# EAGLE board PCB-RPIBO1_SDEXT (EAGLE 6.5.0)
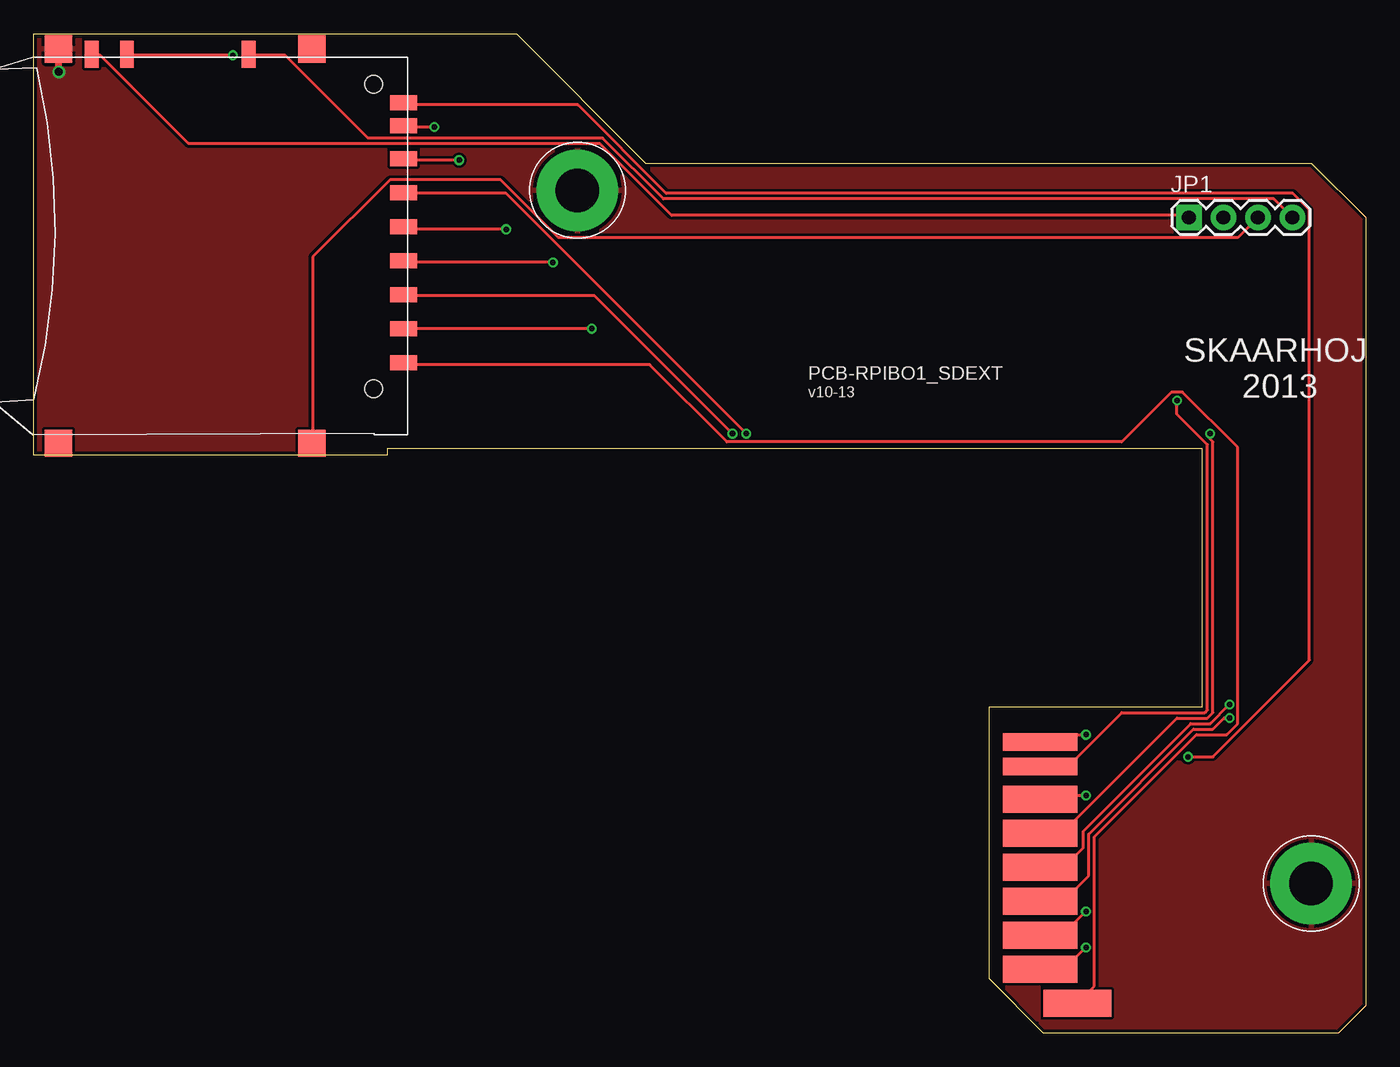
[diagram p0: board, top side]
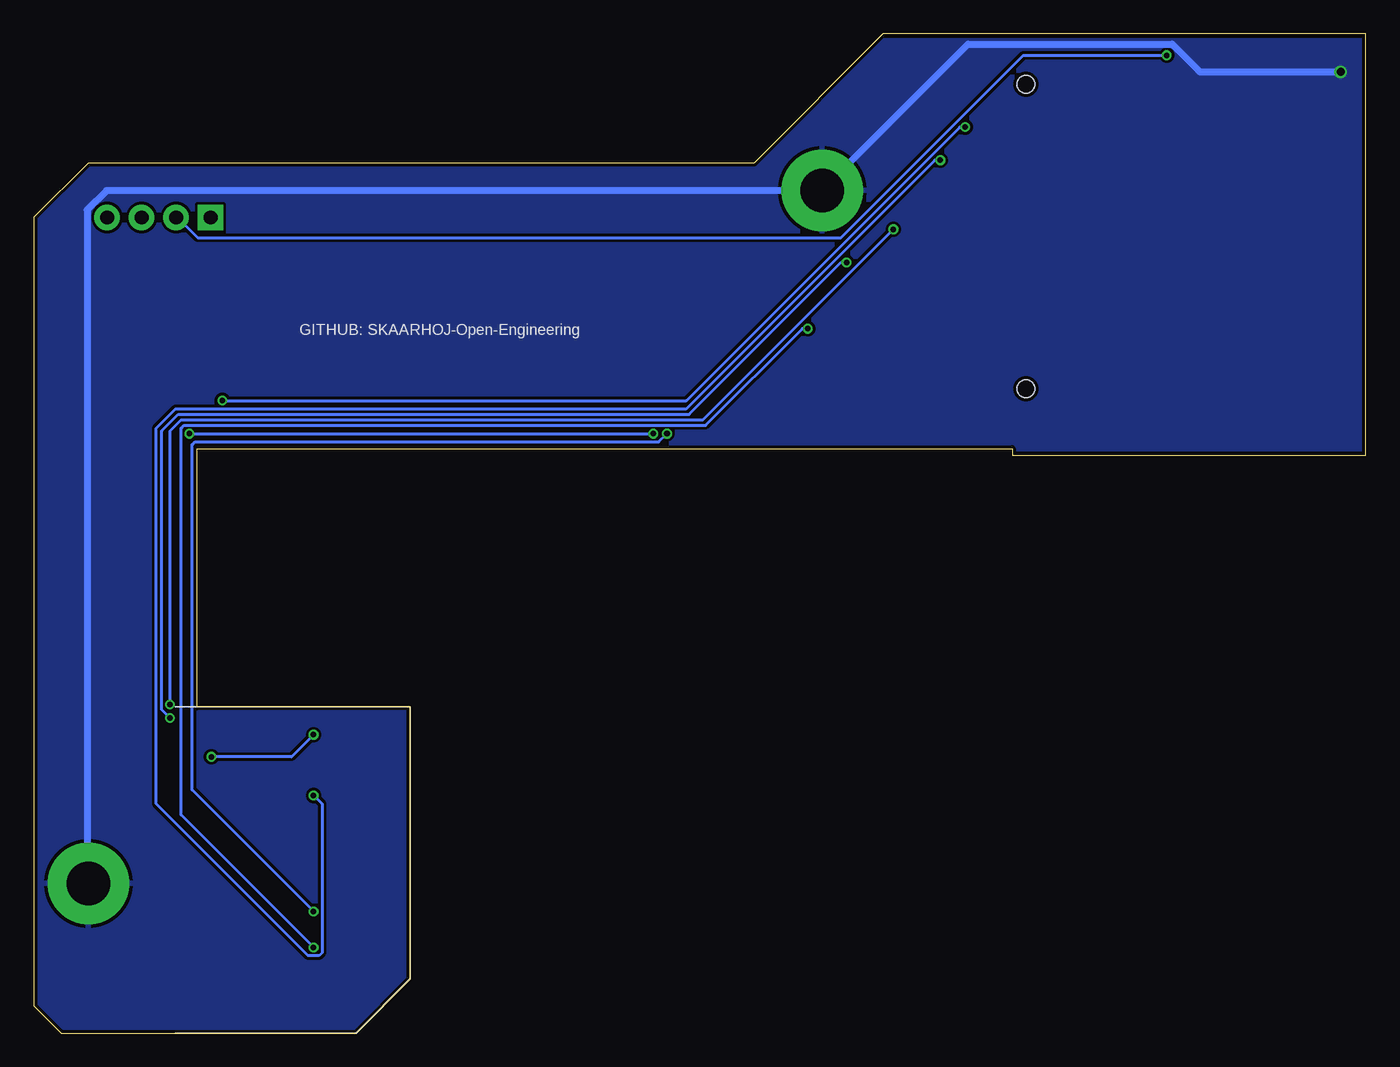
[diagram p1: board, bottom side, seen from below]

Size 98 x 73.5 mm. Coordinates in mm from the lower left corner, seen from the top.
Outline: 74.3,0 70.3,4 70.3,24 86,24 86,43 26,43 26,42.5 0,42.5 0,73.5 35.5,73.5 45,64 94,64 98,60 98,2 96,0 74.3,0
Copper layers (1*16): Top 0.035mm / dielectric 1.5mm / Bottom 0.035mm
Design rules "Fusion_eagle_rule_v1.1": minimum track width 6mil, minimum drill 12mil, track to track 6mil, track to pad 6mil, pad to pad 6mil, via to via 6mil, smd to smd 0mil, copper to edge 10mil, drill to drill 10mil, minimum pad ring 10mil, minimum via ring 6mil, stop-mask expansion 2mil, vias tented up to drill 100mil, thermal gap 10mil
Net classes: 0 default: width 0.203 mm, drill 0.406 mm, clearance 0.152 mm; 1 Power: width 0.508 mm, drill 0.61 mm, clearance 0.203 mm; 3 INput lines: clearance 0.203 mm

## Footprints (pad centres in the part's own frame; a part is rotated, then mirrored left to right if it is on the bottom)
1X04 = drill 1.016 pad 1.88 square: 1 0,0 | drill 1.016 pad 1.88: 2 2.54,0; 3 5.08,0; 4 7.62,0
SD_LARGE = smd 1.1 x 2: 1 6.775,2.2; 2 4.275,2.2; 3 1.775,2.2; 4 -0.725,2.2; 5 -3.225,2.2; 6 -5.725,2.2; 7 -8.15,2.2; 8 -9.85,2.2; 9 9.275,2.2 | smd 2 x 1: CD -13.4,-9.2; WP -13.4,-18.15; WP1 -13.4,-20.75 | smd 2 x 2: GP -13.8,-23.2; GP2 15.2,-23.2; GP3 15.2,-4.55; GP4 -13.8,-4.55 | hole 1.3: -11.2,0; 11.2,0
SD_MALEPCB = smd 2 x 5.5 bottom: 1 7.3,-3.75; 2 4.8,-3.75; 3 2.3,-3.75; 4 -0.2,-3.75; 5 -2.7,-3.75; 6 -5.2,-3.75 | smd 1.3 x 5.5 bottom: 7 -7.6,-3.75; 8 -9.4,-3.75 | smd 2 x 5 bottom: 9 9.8,-6.5
3.2MMPAD6MM = drill 3.2 pad 6: P$1 0,0

## Placement (x,y rotation side)
JP1  [1X04]  85,60 0 top
U$2  SD06132  [SD_LARGE]  25,58.6 270 top
U$4  SDMALEPCB  [SD_MALEPCB]  70.3,12 270 bottom
U$5  GNDPAD6MM  [3.2MMPAD6MM]  40,62 0 top
U$7  GNDPAD6MM  [3.2MMPAD6MM]  94,11 0 top

## Library data of the parts
JP1 = SparkFun
U$2 U$4 U$5 U$7 = SKAARHOJ

## Nets
GND [Power]: U$2.GP U$5.P$1 U$7.P$1
N$1: U$2.7 U$4.7
N$2: U$2.2 U$4.2
N$3: U$2.5 U$4.5
N$4: U$2.1 U$4.1
N$5: U$2.8 U$4.8
N$6: U$2.9 U$4.9
N$7: JP1.4 U$2.CD
N$8: JP1.3 U$2.GP3
N$9: JP1.2 U$2.WP
N$10: JP1.1 U$2.WP1
VDD: U$2.4 U$4.4
VSS1: U$2.3 U$4.3
VSS2: U$2.6 U$4.6

## Tracks (layer width: path | path; a pad name or v marks a point on that pad's centre or on a via)
GND  (via drill 0.61)
  Top 0.508: v1.83,70.71 1.83,72.34 U$2.GP
  Bottom 0.508: v1.83,70.71 12.19,70.71 14.22,72.75 29.26,72.75 39.83,62.18 U$5.P$1 40.23,61.98 92.66,61.98 94.08,60.55 94.08,11.18 U$7.P$1
  pour Top: 0,73 98,73 98,0 70,0 70,24 86,24 86,43 0,43
  pour Bottom: 0,73 98,73 98,0 70,0 70,24 86,24 86,25 86,43 0,43
N$1  (via drill 0.41)
  Top 0.203: v29.46,66.65 27.23,66.65 U$2.7 | v84.12,46.53 84.12,45.52 86.36,43.28 86.36,23.77 86.16,23.57 80.06,23.57 76.2,19.71 74.17,19.71 U$4.7
  Bottom 0.203: v29.46,66.65 29.87,66.65 49.99,46.53 v84.12,46.53
N$2  (via drill 0.41)
  Top 0.203: v51.41,44.09 41.25,54.25 27.23,54.25 U$2.2 | v77.42,8.94 75.79,7.32 74.17,7.32 U$4.2
  Bottom 0.203: v51.41,44.09 52.02,43.48 86.16,43.48 86.36,43.28 86.36,17.88 v77.42,8.94
N$3  (via drill 0.41)
  Top 0.203: v52.43,44.09 34.75,61.77 27.23,61.77 U$2.5 | v86.56,44.09 86.56,43.69 86.77,43.48 86.77,23.57 86.36,23.16 84.12,23.16 75.79,14.83 74.17,14.83 U$4.5
  Bottom 0.203: v86.56,44.09 v52.43,44.09
N$4  (via drill 0.41)
  Top 0.203: v41.05,51.82 27.23,51.82 U$2.1 | v77.42,6.3 76,4.88 74.17,4.88 U$4.1
  Bottom 0.203: v41.05,51.82 41.45,51.82 48.56,44.7 86.97,44.7 87.17,44.5 87.17,16.05 v77.42,6.3
N$5  (via drill 0.41)
  Top 0.203: v84.94,20.32 86.77,20.32 93.88,27.43 93.88,60.55 92.66,61.77 46.53,61.77 40.03,68.28 27.23,68.28 U$2.8 | v77.42,21.95 74.57,21.95 74.17,21.54 U$4.8
  Bottom 0.203: v84.94,20.32 79.05,20.32 v77.42,21.95
N$6
  Top 0.203: U$2.9 27.23,49.17 45.31,49.17 51,43.48 80.06,43.48 83.72,47.14 84.53,47.14 88.59,43.08 88.59,22.76 87.78,21.95 85.55,21.95 78.03,14.43 78.03,3.45 76.81,2.23 U$4.9
N$7
  Top 0.203: U$2.CD 15.85,71.93 18.49,71.93 24.59,65.84 41.86,65.84 46.33,61.37 91.24,61.37 92.46,60.15 JP1.4
N$8
  Top 0.203: U$2.GP3 20.52,43.48 20.52,57.1 26.21,62.79 34.34,62.79 38.61,58.52 88.59,58.52 90.02,59.94 JP1.3
N$9  (via drill 0.41)
  Top 0.203: v14.63,71.93 6.91,71.93 U$2.WP
  Bottom 0.203: v14.63,71.93 25.2,71.93 38.61,58.52 85.95,58.52 87.38,59.94 JP1.2
N$10
  Top 0.203: U$2.WP1 4.27,71.93 4.88,71.93 11.38,65.43 41.66,65.43 46.94,60.15 84.94,60.15 JP1.1
VDD  (via drill 0.41)
  Top 0.203: v34.75,59.13 27.23,59.13 U$2.4 | v87.99,24.18 86.56,22.76 85.14,22.76 77.22,14.83 77.22,13.61 76,12.39 74.17,12.39 U$4.4
  Bottom 0.203: v34.75,59.13 48.77,45.11 87.17,45.11 87.99,44.3 v87.99,24.18
VSS1  (via drill 0.41)
  Top 0.203: v38.2,56.69 27.23,56.69 U$2.3 | v87.99,23.16 87.58,23.16 86.77,22.35 85.34,22.35 77.62,14.63 77.62,11.58 75.79,9.75 74.17,9.75 U$4.3
  Bottom 0.203: v38.2,56.69 38.61,56.69 49.78,45.52 87.38,45.52 88.59,44.3 88.59,23.77 v87.99,23.16
VSS2  (via drill 0.41)
  Top 0.203: v31.29,64.21 27.23,64.21 U$2.6 | v77.42,17.48 74.37,17.48 74.17,17.27 U$4.6
  Bottom 0.203: v31.29,64.21 31.7,64.21 49.99,45.92 87.58,45.92 89,44.5 89,16.87 77.83,5.69 77.01,5.69 76.81,5.89 76.81,16.87 v77.42,17.48

## Text on the board
_tsilk: SKAARHOJ / 2013 | PCB-RPIBO1_SDEXT | v10-13
_bsilk: GITHUB: SKAARHOJ-Open-Engineering